# Allegro board CAD_4.brd
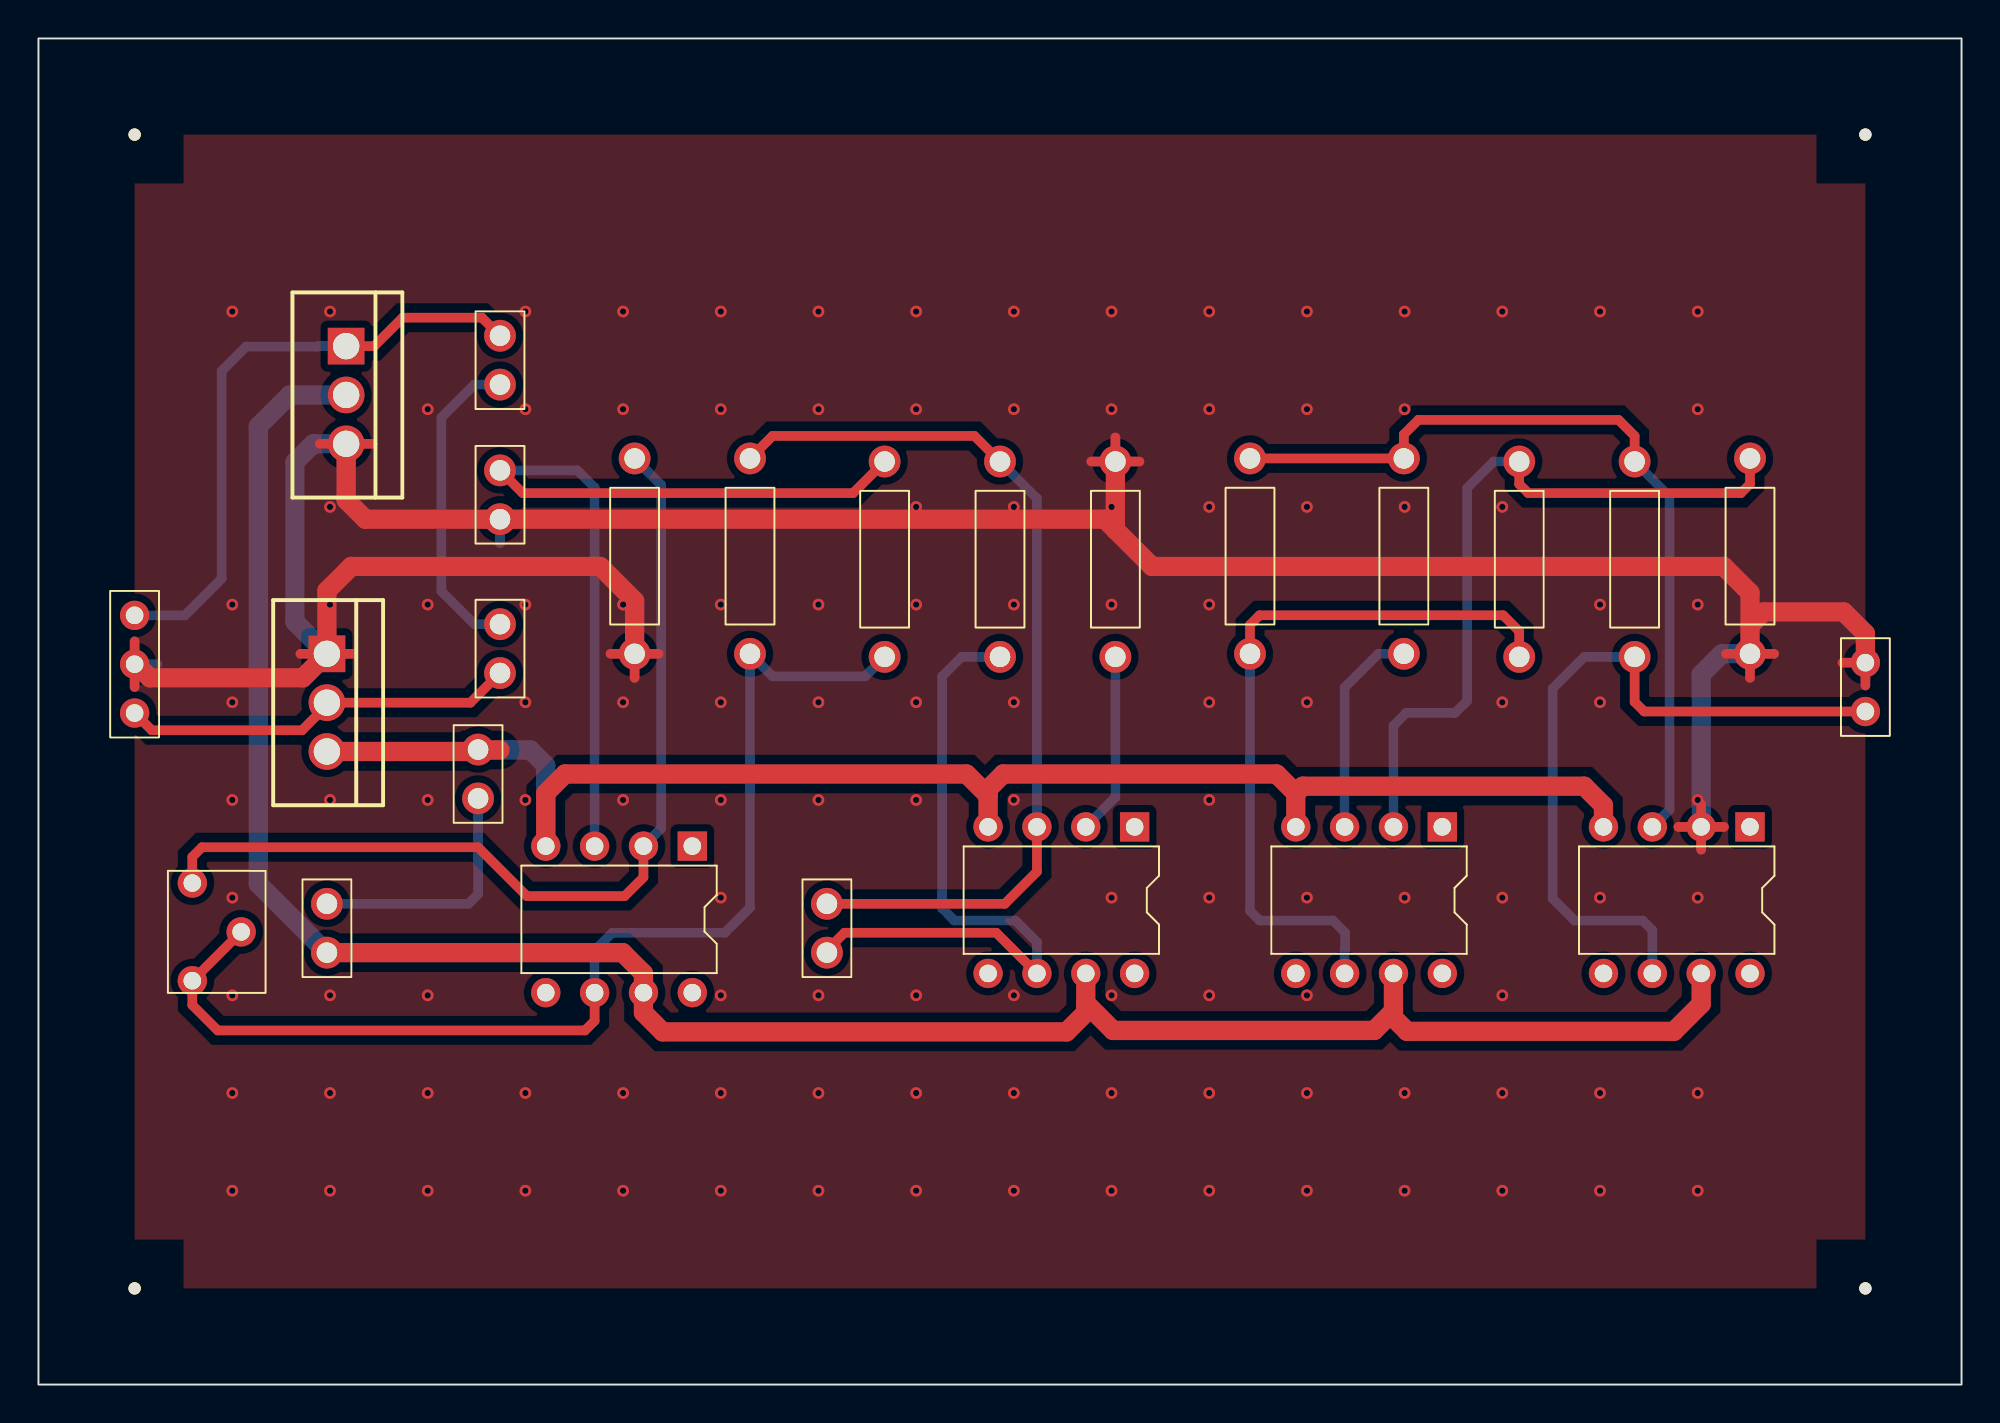
[diagram p0: board, top side]
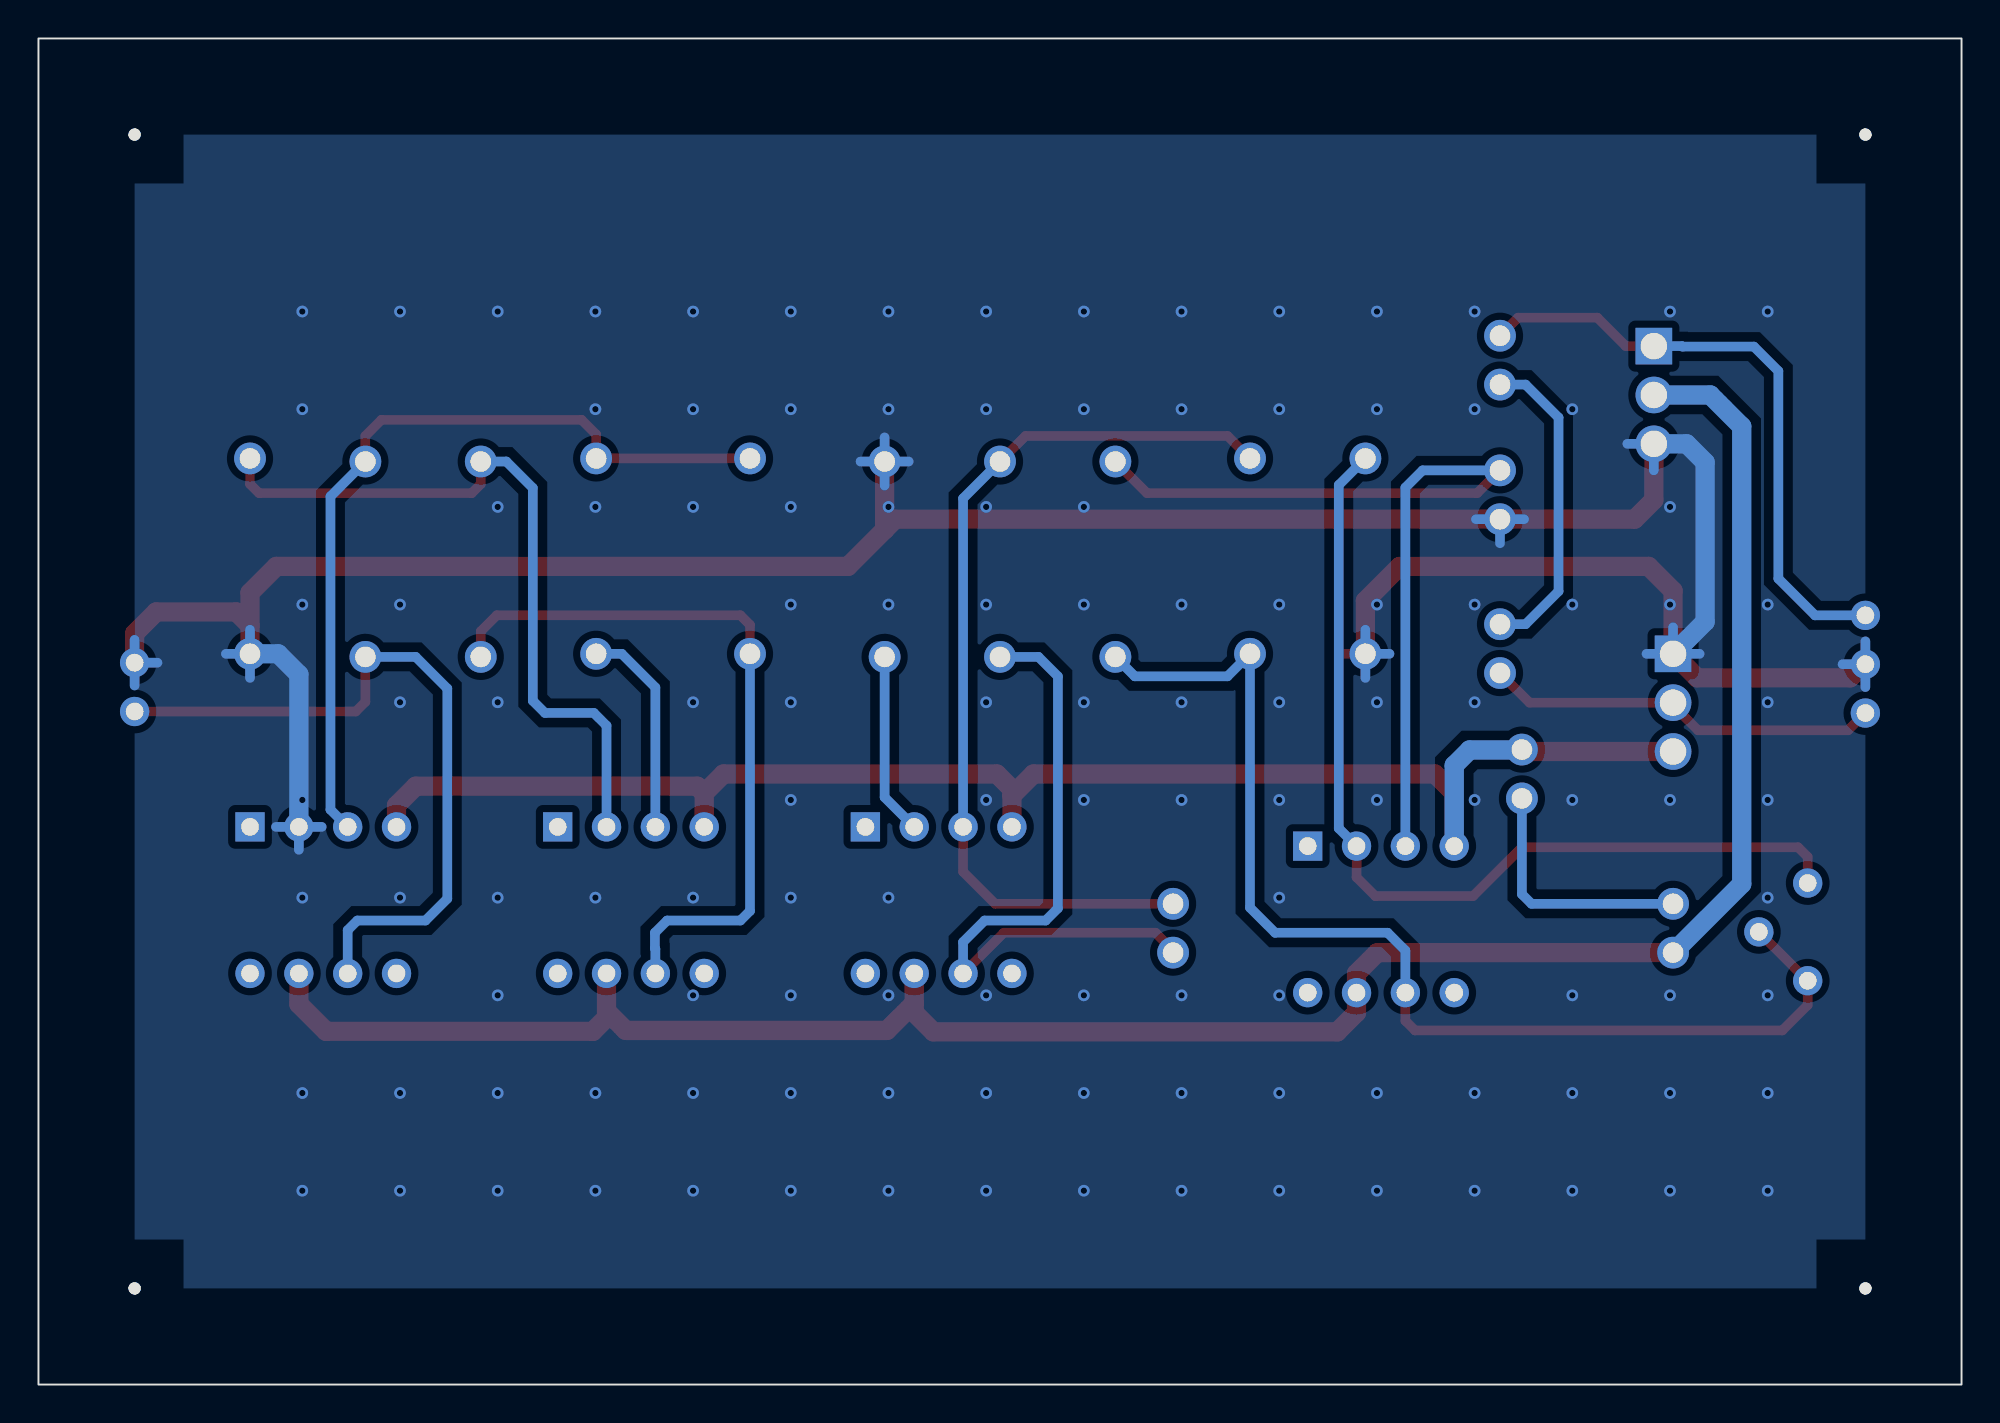
[diagram p1: board, bottom side, seen from below]

Outline 100 x 70 mm; copper layers: TOP, BOTTOM. Coordinates in mm from the lower left corner of the outline.
Outline path: rectangle 0,0 100,70

## Design rules (mm)
constraint set DEFAULT: min track width 0.5

## Placement (name value [footprint] x y rotation side)
C1  0.001uF  [CAPCK05]  41 25 180 top
C2  270pF  [CAPCK05]  24 45 0 top
C3  0.1uF  [CAPCK05]  24 52 0 top
C4  0.1uF  [CAPCK05]  15 25 180 top
C5  0.1uF  [CAPCK05]  24 37 0 top
C6  0.1uF  [CAPCK05]  22.86 33.02 180 top
J1  CON2  [JUMPER2]  95 35 90 top
J2  CON3  [JUMPER3]  5 40 270 top
NOREF  -  [unnamed]  5 65 0 top
NOREF#2  -  [unnamed]  95 5 0 top
NOREF#3  -  [unnamed]  95 65 0 top
NOREF#4  -  [unnamed]  5 5 0 top
R1  10K  [RES400]  44 48 180 top
R2  100K  [RES400]  50 48 180 top
R3  10K  [RES400]  71 38 0 top
R4  R  [RES400]  83 48 180 top
R5  62K  [RES400]  37 38 0 top
R6  10K  [RES400]  56 48 180 top
R7  10K  [RES400]  63 38 0 top
R8  10K  [RES400]  31 38 0 top
R9  10K  [RES400]  77 48 180 top
R10  10K  [RES400]  89 38 0 top
U1  LF351  [DIP8_3]  34 28 270 top
U2  LF351  [DIP8_3]  57 29 270 top
U3  LF351  [DIP8_3]  73 29 270 top
U4  LF351  [DIP8_3]  89 29 270 top
U5  LM7812  [TO220AB]  16 54 270 top
U6  LM7912  [TO220AB]  15 38 270 top
VR1  1M  [RESADJ]  8 21 180 top

## Library data of the parts
C1-C6 = CAP NP: Tolerance: ***; User Part Number: ***
J1 = CON2: User Part Number: ***
J2 = CON3: User Part Number: ***
R1-R10 = R: Tolerance: ***; User Part Number: ***
U1-U4 = LF351: Tolerance: ***; User Part Number: ***
U5 = LM7812/TO_5
U6 = LM7912C/TO3_2
VR1 = POT: Tolerance: ***; User Part Number: ***

## Footprints (pads in the part's own frame, mm; a bottom-side part is the same pattern mirrored in y, then rotated)
CAPCK05
  round 1.651 hole 1.067: 1(0,0) 2(0,2.54)
DIP8_3
  rect 1.524x1.524 hole 0.914: 1(0,0)
  round 1.524 hole 0.914: 2(0,-2.54) 3(0,-5.08) 4(0,-7.62) 5(7.62,-7.62) 6(7.62,-5.08) 7(7.62,-2.54) 8(7.62,0)
JUMPER2
  round 1.524 hole 0.914: 1(0,0) 2(2.54,0)
JUMPER3
  round 1.524 hole 0.914: 1(0,0) 2(2.54,0) 3(5.08,0)
RES400
  round 1.651 hole 1.067: 1(0,0) 2(0,10.16)
RESADJ
  round 1.524 hole 0.914: 1(0,0) 2(-2.54,-2.54) 3(0,-5.08)
TO220AB
  rect 1.905x1.905 hole 1.372: 1(0,0)
  round 1.905 hole 1.372: 2(2.54,0) 3(5.08,0)
unnamed
  round 0.635 hole 3.175 unplated: (0,0)

## Nets
+VCC: C4.2 U1.7 U2.7 U3.7 U4.7 U5.2(VOUT)
-VCC: C6.1 U1.4(V-) U2.4(V-) U3.4(V-) U4.4(V-) U6.3(VOUT)
GND: C2.1 J1.2 J2.2 R6.1 R8.1 R10.1 U4.2 U5.3 U6.1
N00463: R1.2 R5.1 U1.6 VR1.1 VR1.2(WIPER)
N00478: C2.2 R1.1 U1.3
N00525: C1.1 R2.1 R5.2 U2.3
N00716: C1.2 R2.2 U2.6
N00841: R6.2 U2.2
N00903: R8.2 U1.2 VR1.3
N01061: R3.1 U3.3
N01073: R3.2 R4.1 R7.2 U4.3
N01079: R7.1 R9.2 U3.6
N01446: J1.1 R4.2 U4.6
N01510: R9.1 R10.2 U3.2
N01809: C3.2 J2.1 U5.1
N01925: C5.1 J2.3 U6.2
N02789: C3.1 C5.2
N02926: C4.1 C6.2

Pads without a net: U1 1 5 8; U2 1 5 8; U3 1 5 8; U4 1 5 8

## Via types
v1: diameter 0.61, hole 0.33, TOP to BOTTOM, 122 vias

## Routing (per net, layer and track width the routed paths; a pad name or vN(x,y) marks a point on that pad's centre or on a via; arc(x,y) is an arc through that point)
+VCC: length 116.7
  TOP w1: U4.7 86.46,19.79 85.04,18.37 71.17,18.37 70.46,19.07 70.46,19.41 ; 54.46,19.84 54.46,19.34 53.46,18.34 32.46,18.34 31.46,19.34 U1.7 31.46,21.38 30.38,22.46 C4.2 ; 54.46,19.84 55.88,18.41 69.46,18.41 70.46,19.41 ; 54.46,19.84 U2.7 ; U3.7 70.46,19.41
  BOTTOM w1: C4.2 11.43,26.03 11.43,49.83 13.06,51.46 U5.2
-VCC: length 82.4
  TOP w1: 22.34,32.92 22.42,33 24,33 ; 22.34,32.92 22.76,32.92 C6.1 ; 22.34,32.92 U6.3 ; 65.38,30.75 65.75,31.11 80.38,31.11 81.38,30.11 U4.4 ; 65.38,30.75 U3.4 ; 65.38,30.75 64.38,31.75 50.16,31.75 49.38,30.96 49.38,30.63 ; 49.38,30.63 48.26,31.75 27.38,31.75 26.38,30.75 U1.4 ; 49.38,30.63 U2.4
  BOTTOM w1: C6.1 22.88,33 25.58,33 26.38,32.2 U1.4
GND: length 211.8
  TOP w0.5: 5,36.27 J2.2 5,38.65 ; R6.1 56,49.25 ; R6.1 57.25,48 ; R6.1 54.75,48 ; 16.38,38 U6.1 13.62,38 ; R10.1 90.25,38 ; R10.1 89,36.75 ; R10.1 87.75,38 ; 93.81,37.54 J1.2 95,36.35 ; 29.75,38 R8.1 ; R8.1 32.25,38 ; R8.1 31,36.75 ; U4.2 87.65,29 ; U4.2 86.46,30.19 ; U4.2 85.27,29 ; U4.2 86.46,27.81 ; 14.62,48.92 U5.3 17.38,48.92
  TOP w1: U5.3 16,46 17,45 C2.1 55.45,45 56,44.45 ; J2.2 5.08,37.46 5.79,36.75 13.75,36.75 U6.1 15,41.27 16.27,42.55 29.21,42.55 31,40.76 R8.1 ; J1.2 95,39.06 93.88,40.18 89.71,40.18 89,39.47 ; R6.1 56,44.45 ; 56,44.45 57.91,42.55 87.63,42.55 89,41.17 89,39.47 ; R10.1 89,39.47
  BOTTOM w0.5: 56,46.75 R6.1 ; R6.1 57.25,48 ; R6.1 56,49.25 ; R6.1 54.75,48 ; 5,36.27 J2.2 ; J2.2 5,38.65 ; J2.2 6.19,37.46 ; 29.75,38 R8.1 ; R8.1 31,39.25 ; R8.1 31,36.75 ; 86.46,27.81 U4.2 ; U4.2 87.65,29 ; U4.2 85.27,29 ; R10.1 90.25,38 ; R10.1 89,39.25 ; R10.1 89,36.75 ; 17.38,48.92 U5.3 16,47.54 ; 22.75,45 C2.1 ; C2.1 25.25,45 ; C2.1 24,43.75 ; 95,36.35 J1.2 ; J1.2 93.81,37.54 ; J1.2 95,38.73 ; 13.62,38 U6.1 ; U6.1 16.38,38 ; U6.1 15,39.38
  BOTTOM w1: U5.3 14.29,48.92 13.34,47.96 13.34,39.66 U6.1 ; R10.1 87.53,38 86.46,36.93 U4.2
  vias: v1(10.08,55.8) v1(10.08,40.56) v1(10.08,35.48) v1(10.08,30.4) v1(10.08,25.32) v1(10.08,20.24) v1(10.08,15.16) v1(10.08,10.08) v1(15.16,55.8) v1(15.16,45.64) v1(15.16,40.56) v1(15.16,30.4) v1(15.16,20.24) v1(15.16,15.16) v1(15.16,10.08) v1(20.24,50.72) v1(20.24,40.56) v1(20.24,30.4) v1(20.24,20.24) v1(20.24,15.16) v1(20.24,10.08) v1(25.32,55.8) v1(25.32,50.72) v1(25.32,40.56) v1(25.32,35.48) v1(25.32,30.4) v1(25.32,15.16) v1(25.32,10.08) v1(30.4,55.8) v1(30.4,50.72) v1(30.4,40.56) v1(30.4,35.48) v1(30.4,30.4) v1(30.4,15.16) v1(30.4,10.08) v1(35.48,55.8) v1(35.48,50.72) v1(35.48,40.56) v1(35.48,35.48) v1(35.48,30.4) v1(35.48,25.32) v1(35.48,20.24) v1(35.48,15.16) v1(35.48,10.08) v1(40.56,55.8) v1(40.56,50.72) v1(40.56,40.56) v1(40.56,35.48) v1(40.56,30.4) v1(40.56,20.24) v1(40.56,15.16) v1(40.56,10.08) v1(45.64,55.8) v1(45.64,50.72) v1(45.64,45.64) v1(45.64,40.56) v1(45.64,35.48) v1(45.64,30.4) v1(45.64,20.24) v1(45.64,15.16) v1(45.64,10.08) v1(50.72,55.8) v1(50.72,50.72) v1(50.72,45.64) v1(50.72,40.56) v1(50.72,35.48) v1(50.72,30.4) v1(50.72,20.24) v1(50.72,15.16) v1(50.72,10.08) v1(55.8,55.8) v1(55.8,50.72) v1(55.8,45.64) v1(55.8,40.56) v1(55.8,25.32) v1(55.8,20.24) v1(55.8,15.16) v1(55.8,10.08) v1(60.88,55.8) v1(60.88,50.72) v1(60.88,45.64) v1(60.88,40.56) v1(60.88,35.48) v1(60.88,30.4) v1(60.88,25.32) v1(60.88,20.24) v1(60.88,15.16) v1(60.88,10.08) v1(65.96,55.8) v1(65.96,50.72) v1(65.96,45.64) v1(65.96,35.48) v1(65.96,25.32) v1(65.96,20.24) v1(65.96,15.16) v1(65.96,10.08) v1(71.04,55.8) v1(71.04,50.72) v1(71.04,45.64) v1(71.04,25.32) v1(71.04,15.16) v1(71.04,10.08) v1(76.12,55.8) v1(76.12,45.64) v1(76.12,35.48) v1(76.12,25.32) v1(76.12,20.24) v1(76.12,15.16) v1(76.12,10.08) v1(81.2,55.8) v1(81.2,40.56) v1(81.2,35.48) v1(81.2,25.32) v1(81.2,15.16) v1(81.2,10.08) v1(86.28,55.8) v1(86.28,50.72) v1(86.28,40.56) v1(86.28,30.4) v1(86.28,25.32) v1(86.28,15.16) v1(86.28,10.08)
N00463: length 60.3
  TOP w0.5: VR1.2 VR1.1 8,19.73 9.32,18.41 28.42,18.41 28.92,18.91 U1.6
  BOTTOM w0.5: R1.2 42.99,36.83 38.17,36.83 R5.1 37,24.8 35.7,23.5 29.84,23.5 28.92,22.57 U1.6
N00478: length 45.1
  TOP w0.5: R1.1 42.35,46.35 25.18,46.35 C2.2
  BOTTOM w0.5: C2.2 28.02,47.54 28.92,46.65 U1.3
N00525: length 47.8
  TOP w0.5: C1.1 50.25,25 51.92,26.67 U2.3 ; R2.1 48.67,49.33 38.17,49.33 R5.2
  BOTTOM w0.5: U2.3 51.92,46.08 R2.1
N00716: length 35.1
  TOP w0.5: C1.2 41,22.59 41.91,23.5 49.8,23.5 U2.6
  BOTTOM w0.5: R2.2 48,37.84 46.99,36.83 46.99,24.77 47.62,24.13 50.8,24.13 51.92,23.01 U2.6
N00841: length 9.5
  BOTTOM w0.5: R6.2 56,30.54 U2.2
N00903: length 49.2
  TOP w0.5: VR1.3 8,27.44 8.5,27.94 22.86,27.94 25.4,25.4 30.48,25.4 31.46,26.38 U1.2
  BOTTOM w0.5: U1.2 32.38,28.93 32.38,46.77 R8.2
N01061: length 11.1
  BOTTOM w0.5: R3.1 69.67,38 67.92,36.25 U3.3
N01073: length 43.4
  TOP w0.5: R4.1 83,49.33 82.17,50.16 71.75,50.16 71,49.41 R3.2 R7.2
  BOTTOM w0.5: U4.3 84.82,29.9 84.82,46.18 R4.1
N01079: length 38.3
  TOP w0.5: R7.1 63,39.51 63.5,40.01 76.17,40.01 77,39.17 R9.2
  BOTTOM w0.5: U3.6 67.92,22.65 67.94,22.67 67.94,23.5 67.31,24.13 63.5,24.13 63,24.63 R7.1
N01446: length 38.5
  TOP w0.5: R4.2 83,35.5 83.5,35 J1.1
  BOTTOM w0.5: U4.6 83.92,23.63 83.42,24.13 79.88,24.13 78.74,25.27 78.74,36.2 80.39,37.84 R4.2
N01510: length 38.9
  TOP w0.5: R10.2 89,46.83 88.53,46.35 77.47,46.35 77,46.83 R9.1
  BOTTOM w0.5: U3.2 70.46,34.27 71.12,34.92 73.66,34.92 74.3,35.56 74.3,46.62 75.67,48 R9.1
N01809: length 32.1
  TOP w0.5: C3.2 23.06,55.48 18.94,55.48 17.46,54 U5.1
  BOTTOM w0.5: U5.1 14.54,54 14.52,53.98 10.79,53.98 9.53,52.7 9.53,41.91 7.62,40 J2.1
N01925: length 20.7
  TOP w0.5: J2.3 5.9,34.02 13.7,34.02 15,35.32 U6.2 22.46,35.46 C5.1
N02789: length 16.5
  BOTTOM w0.5: C3.1 22.67,52 20.95,50.28 20.95,41.26 22.67,39.54 C5.2
N02926: length 13
  BOTTOM w0.5: C4.1 22.36,25 22.86,25.5 C6.2

## Copper pours and planes (outline as drawn; the poured copper is in the pictures)
GND on TOP: 5,5 5,65 95,65 95,5 ; 2 cut-outs
GND on BOTTOM: 5,5 5,65 95,65 95,5

## Text on the board
DIMENSION: ELECTRONIC CAD | OSCILLATOR | FIGURE | FINISHED_SIZE | 0.914 | 1.067 | 1.372 | 3.175 | DRILL CHART: TOP to BOTTOM | ALL UNITS ARE IN MILLIMETERS | PLATED | NON-PLATED | QTY | 40 | 32 | 6 | 4
